# Altium PCB ChassisPowerDistribution_B_2.5_RW.PcbDoc
Units mil, origin at the board's own origin, x right, y up, seen from the top; angles counter-clockwise.
Board outline 5000 x 4750 mil, 2 copper layers (Top Layer, Bottom Layer); 160 components, 75 nets, 526 pads, 12 vias.
Unrouted connection lines stored in the file: 386.
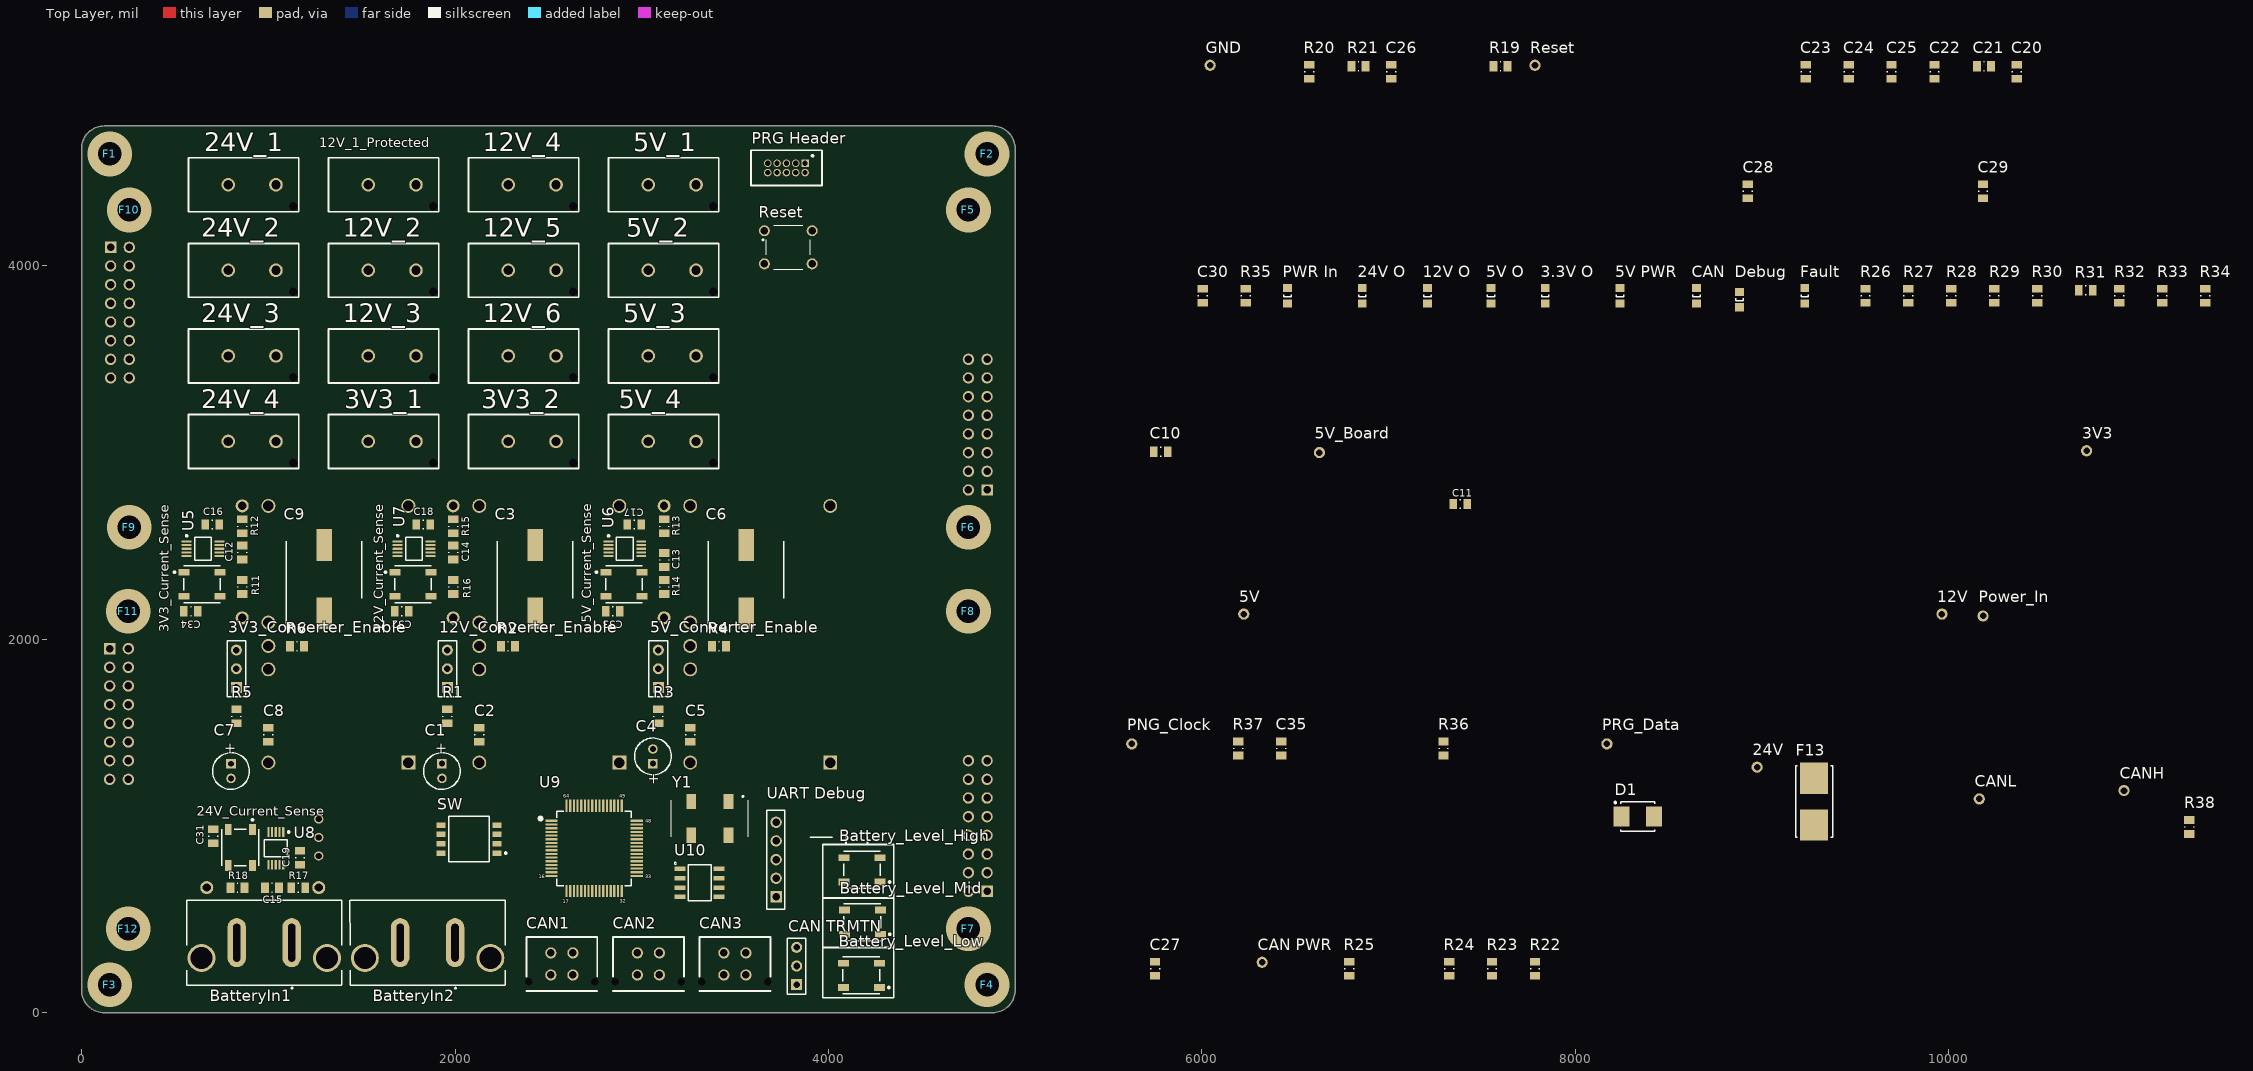
[diagram p0: Top Layer view]
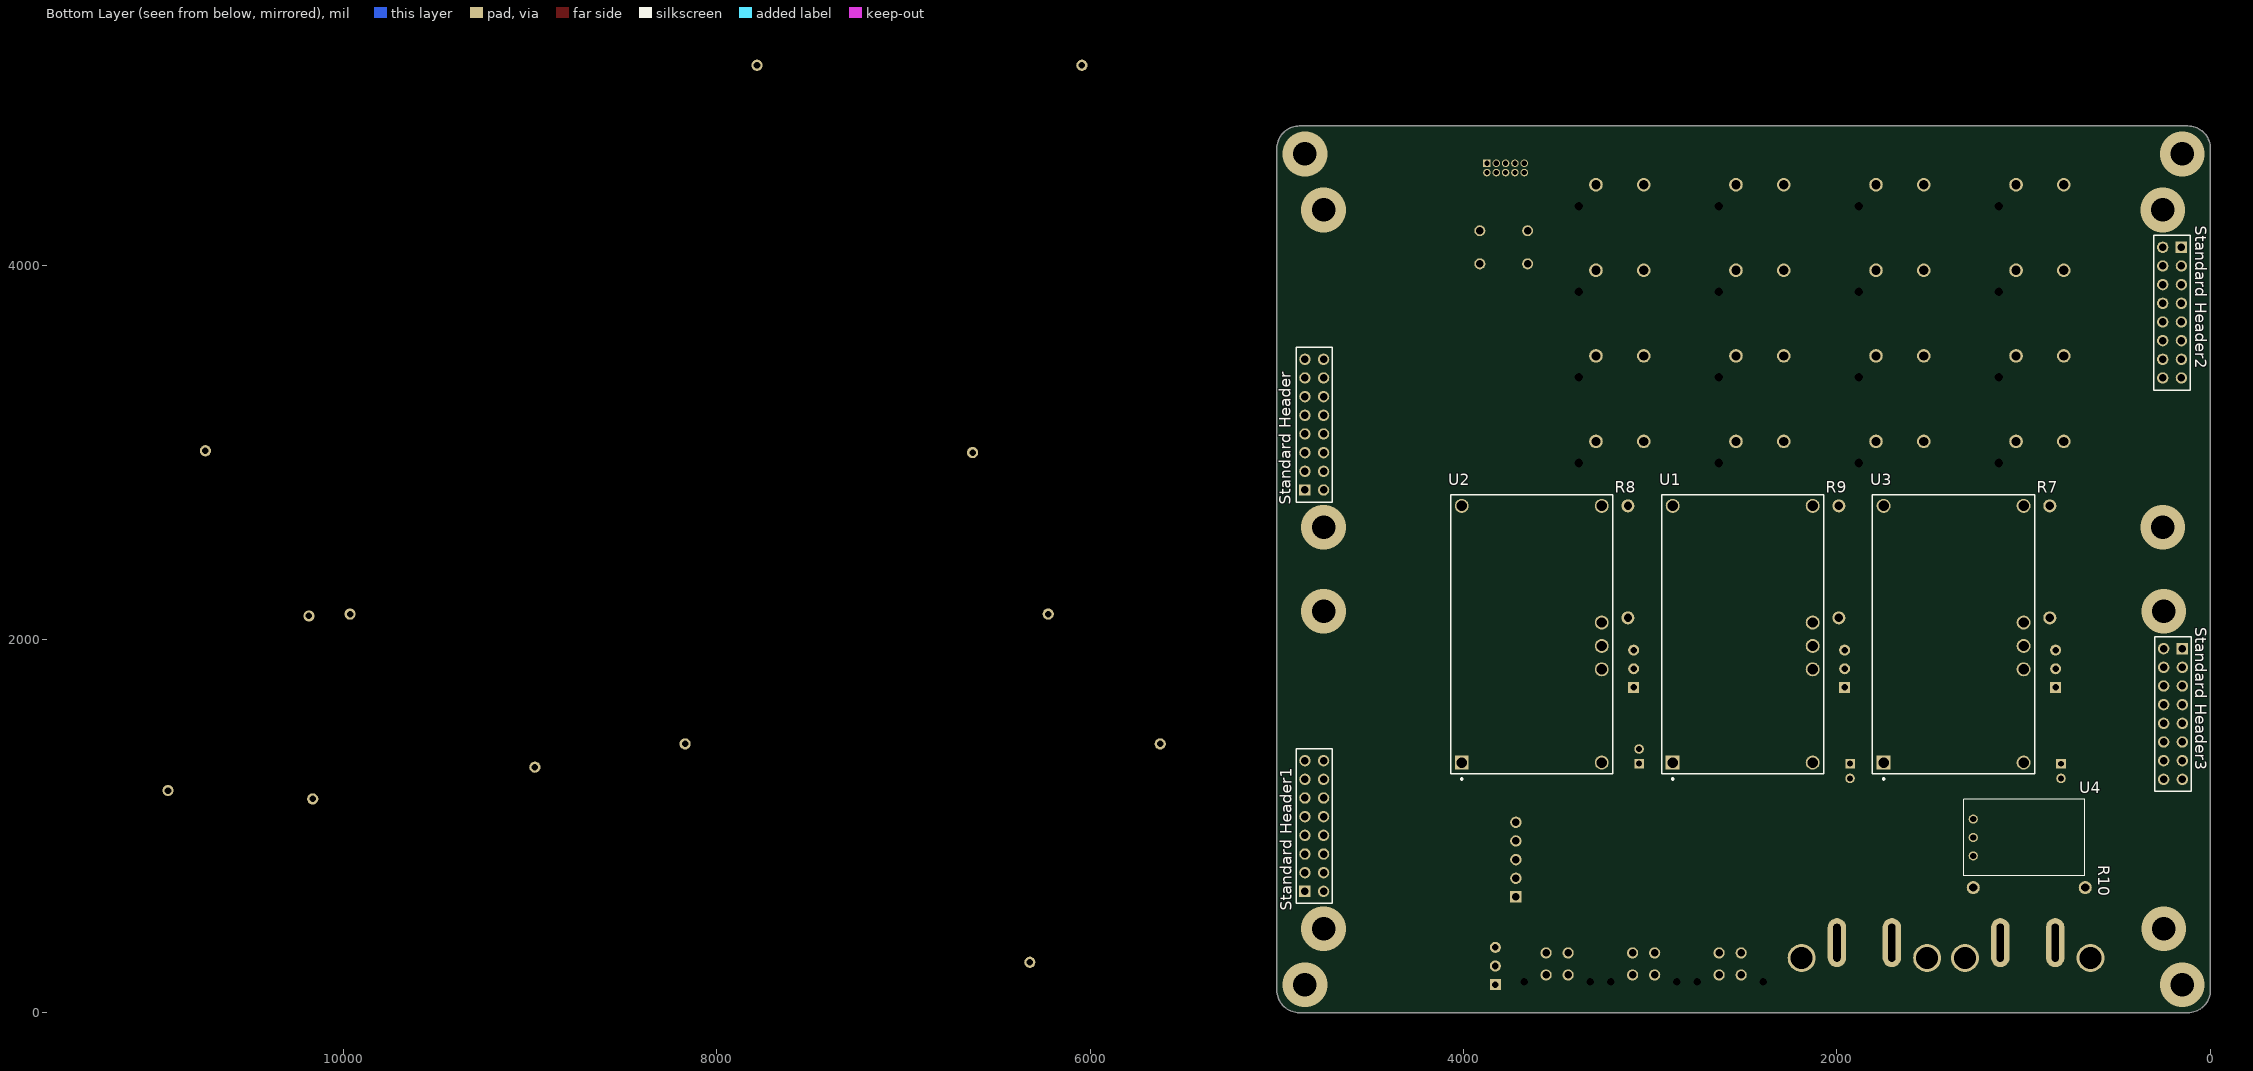
[diagram p1: Bottom Layer view, seen from below]

## Layer stack, top to bottom
Top Solder: solder mask 0.4, Solder Resist, Dk 3.5
Top Layer: signal copper 1.4
Dielectric 1: dielectric 12.6, FR-4, Dk 4.8
Bottom Layer: signal copper 1.4
Bottom Solder: solder mask 0.4, Solder Resist, Dk 3.5

## Board outline
120,0 4880,0 ccw(c4880,120) 5000,120 5000,4630 ccw(c4880,4630) 4880,4750 120,4750 ccw(c120,4630) 0,4630 0,120 ccw(c120,120)

## Design rules (kind name [scope] priority, off if disabled: settings)
BoardOutlineClearance [All] p1: gap=7.87 ignorepadtopadclearanceinfootprint=FALSE except(15.75: Arc-SplitBarrior Arc-SplitContinuation Track-SplitBarrior Track-SplitContinuation SMDPad-SplitBarrior SMDPad-SplitContinuation THPad-SplitBarrior THPad-SplitContinuation Via-SplitBarrior Via-SplitContinuation Fill-SplitBarrior Fill-SplitContinuation Poly-SplitBarrior Poly-SplitContinuation Region-SplitBarrior Region-SplitContinuation Text-SplitBarrior Text-SplitContinuation)
Clearance "Clearance Bottom Layer" [OnLayer('Bottom Layer')] p1: gap=8 ignorepadtopadclearanceinfootprint=TRUE except(10: Arc-Text Track-Text SMDPad-Text THPad-Text Via-Text Fill-Text Poly-Text Region-Text Text-Text)
Clearance "Clearance Top Layer" [OnLayer('Top Layer')] p2: gap=8 ignorepadtopadclearanceinfootprint=TRUE except(10: Arc-Text Track-Text SMDPad-Text THPad-Text Via-Text Fill-Text Poly-Text Region-Text Text-Text)
Clearance [All] p3: gap=7.87 ignorepadtopadclearanceinfootprint=FALSE except(3.5: Arc-Arc Arc-Track Arc-SMDPad Track-Track Track-SMDPad SMDPad-SMDPad; 5: Arc-Via Track-Via SMDPad-Via THPad-Via Via-Via; 10: Arc-Text Track-Text SMDPad-Text THPad-Text Via-Text Fill-Text Poly-Text Region-Text Text-Text)
HoleSize [All] p1: absolutevalues=TRUE maxlimit=248.03 minlimit=7.87 maxpercent=80.000 minpercent=20.000
MinimumAnnularRing [All] p1: minimumring=3
MinimumSolderMaskSliver [All] p1: minsoldermaskwidth=3.94
PolygonConnect PolygonConnect_1 [All] p1: thpad.connectstyle=Relief thpad.reliefconductorwidth=20 thpad.reliefentries=4 thpad.polygonreliefangle="90 Angle" thpad.airgapwidth=10 smdpad.connectstyle=Relief smdpad.reliefconductorwidth=20 smdpad.reliefentries=4 smdpad.polygonreliefangle="90 Angle" smdpad.airgapwidth=10 via.connectstyle=Direct via.reliefconductorwidth=20 via.reliefentries=4 via.polygonreliefangle="90 Angle" via.airgapwidth=10
RoutingCorners [All] p1: cornerstyle=Round minsetback=100 maxsetback=100
RoutingVias [All] p1: holewidth=19.68 width=39.37 viastyle="Through Hole" minholewidth=7.87 minwidth=17.72 maxholewidth=39.37 maxwidth=78.74
SilkToSilkClearance [All] p1: silktosilkclearance=3.94
SilkToSolderMaskClearance [IsPad] p1: minsilkscreentomaskgap=3.94 clearancetoexposedcopper=TRUE
SolderMaskExpansion [All] p1: expansion=4 istentingtop=FALSE
Width [All] p1: maxlimit=100 minlimit=3.5 preferedwidth=15
25 further rules are at their usual default settings.

## Classes and differential pairs
component class Microcontroller: C20 C21 C22 C23 C24 C25 C26 F1 F2 F3 F4 GND R19 R20 R21 Reset U9 Y1
component class LEDs: "3.3V O" 3V3_Current_Sense "5V O" "5V PWR" 5V_Current_Sense "12V O" 12V_Current_Sense "24V O" 24V_Current_Sense Battery_Level_High Battery_Level_Low Battery_Level_Mid C28 C29 C30 C31 C32 C33 C34 CAN Debug Fault "PWR In" R26 R27 R28 R29 R30 R31 R32 R33 R34 R35
component class "Current Sensors": C12 C13 C14 C15 C16 C17 C18 C19 R7 R8 R9 R10 R11 R12 R13 R14 R15 R16 R17 R18 U5 U6 U7 U8
component class Converters: 3V3 3V3_Converter_Enable 5V 5V_Board 5V_Converter_Enable 12V 12V_Converter_Enable 6006.102 C1 C2 C3 C4 C5 C6 C7 C8 C9 C10 C11 Power_In R1 R2 R3 R4 R5 R6 U1 U2 U3 U4
component class Connectors: 3V3_1 3V3_2 5V_1 5V_2 5V_3 5V_4 12V_1_Protected 12V_2 12V_3 12V_4 12V_5 12V_6 24V 24V_1 24V_2 24V_3 24V_4 BatteryIn1 BatteryIn2 C35 CAN1 CAN2 CAN3 "CAN TRMTN" CANH CANL D1 F5 F6 F7 F8 F9 F10 F11 F12 F13 PNG_Clock "PRG Header" PRG_Data R36 R37 R38 "Standard Header" "Standard Header1" "Standard Header2" "Standard Header3" "UART Debug"
component class CAN: C27 "CAN PWR" R22 R23 R24 R25 SW U10

## Components (designator, comment, footprint, x,y, rotation, side; value= is the part's Value field where it differs from the comment)
"3.3V O" "Yellow LED" 0805_A 7840,3840 r90 top
3V3 "Test Point" "Test Point Through-hole" 10765,2990 r90 top
3V3_1 "Molex 6.5MM  power connector" "power connector" 1302.8,3240.71 r270 top
3V3_2 "Molex 6.5MM  power connector" "power connector" 2052.8,3240.71 r270 top
3V3_Converter_Enable "Header 3" HDR1X3 828.89,1742.24 r90 top
3V3_Current_Sense "RBG_LED" RGB_LED_1 644.99,2295 r0 top
5V "Test Point" "Test Point Through-hole" 6205,2110 r0 top
"5V O" "Yellow LED" 0805_A 7550,3840 r90 top
"5V PWR" "Yellow LED" 0805_A 8240,3840 r90 top
5V_1 "Molex 6.5MM  power connector" "power connector" 2802.8,4615.71 r270 top
5V_2 "Molex 6.5MM  power connector" "power connector" 2802.8,4157.38 r270 top
5V_3 "Molex 6.5MM  power connector" "power connector" 2802.8,3699.04 r270 top
5V_4 "Molex 6.5MM  power connector" "power connector" 2802.8,3240.71 r270 top
5V_Board "Test Point" "Test Point Through-hole" 6655,2980 r90 top
5V_Converter_Enable "Header 3" HDR1X3 3088.9,1742.24 r90 top
5V_Current_Sense "RBG_LED" RGB_LED_1 2905,2295 r0 top
12V "Test Point" "Test Point Through-hole" 9990,2115 r90 top
"12V O" "Yellow LED" 0805_A 7210,3840 r90 top
12V_1_Protected "Molex 6.5MM  power connector" "power connector" 1302.8,4615.71 r270 top
12V_2 "Molex 6.5MM  power connector" "power connector" 1302.8,4157.38 r270 top
12V_3 "Molex 6.5MM  power connector" "power connector" 1302.8,3699.04 r270 top
12V_4 "Molex 6.5MM  power connector" "power connector" 2052.8,4615.71 r270 top
12V_5 "Molex 6.5MM  power connector" "power connector" 2052.8,4157.38 r270 top
12V_6 "Molex 6.5MM  power connector" "power connector" 2052.8,3699.04 r270 top
12V_Converter_Enable "Header 3" HDR1X3 1958.9,1742.24 r90 top
12V_Current_Sense "RBG_LED" RGB_LED_1 1775,2295 r0 top
24V "Test Point" "Test Point Through-hole" 9000,1295 r90 top
"24V O" "Yellow LED" 0805_A 6860,3840 r90 top
24V_1 "Molex 6.5MM  power connector" "power connector" 552.8,4615.71 r270 top
24V_2 "Molex 6.5MM  power connector" "power connector" 552.8,4157.38 r270 top
24V_3 "Molex 6.5MM  power connector" "power connector" 552.8,3699.04 r270 top
24V_4 "Molex 6.5MM  power connector" "power connector" 552.8,3240.71 r270 top
24V_Current_Sense "RBG_LED" RGB_LED_1 850,884.99 r270 top
Battery_Level_High "RBG_LED" RGB_LED_1 4180,765 r180 top
Battery_Level_Low "RBG_LED" RGB_LED_1 4176.46,200.04 r180 top
Battery_Level_Mid "RBG_LED" RGB_LED_1 4181.46,484.96 r180 top
BatteryIn1 "Super Saber" "Super Sabre" 571.45,175.29 r0 top
BatteryIn2 "Super Saber" "Super Sabre" 1446.45,175.29 r0 top
C1 "ECA1HM100" CAPPR55-200-1100X500X1200 1930,1294.41 r270 top
C2 "Capacitor 0805" "Cap 0805" 2130,1489.41 r270 top
C3 "Motor Capacitor SMD" CAP_SMD_CAN 2428.9,2322.24 r90 top value="330 uF"
C4 "ECA1HM100" CAPPR55-200-1100X500X1200 3060,1373.15 r90 top
C5 "Capacitor 0805" "Cap 0805" 3260,1489.41 r270 top
C6 "Motor Capacitor SMD" CAP_SMD_CAN 3558.9,2322.24 r90 top value="330 uF"
C7 "ECA1HM100" CAPPR55-200-1100X500X1200 799.99,1294.4 r270 top
C8 "Capacitor 0805" "Cap 0805" 999.99,1489.41 r270 top
C9 "Motor Capacitor SMD" CAP_SMD_CAN 1298.89,2322.24 r90 top value="330 uF"
C10 "Capacitor 0805" "Cap 0805" 5780,3005 r0 top
C11 "Capacitor 0805" "Cap 0805" 7385,2725 r0 top
C12 "0805 Capacitor" "Cap 0805" 859.99,2465 r270 top value=0.1µF
C13 "0805 Capacitor" "Cap 0805" 3120,2425 r270 top value=0.1µF
C14 "0805 Capacitor" "Cap 0805" 1990,2465 r270 top value=0.1µF
C15 "0805 Capacitor" "Cap 0805" 1020,669.99 r180 top value=0.1µF
C16 "Capacitor 0805" "Cap 0805" 699.99,2615 r180 top
C17 "Capacitor 0805" "Cap 0805" 2960,2615 r180 top
C18 "Capacitor 0805" "Cap 0805" 1830,2615 r0 top
C19 "Capacitor 0805" "Cap 0805" 1170,829.99 r270 top
C20 "Capacitor 0805" "Cap 0805" 10365,5040 r90 top
C21 "Capacitor 0805" "Cap 0805" 10190,5070 r0 top
C22 "Capacitor 0805" "Cap 0805" 9925,5040 r90 top
C23 "0805 Capacitor" "Cap 0805" 9235,5040 r90 top value=0.1µF
C24 "Capacitor 0805" "Cap 0805" 9465,5040 r90 top
C25 "Capacitor 0805" "Cap 0805" 9695,5040 r90 top
C26 "Capacitor 0805" "Cap 0805" 7015,5040 r90 top
C27 "Capacitor 0805" "Cap 0805" 5750,235 r90 top
C28 "0805 Capacitor" "Cap 0805" 8925,4400 r90 top value=0.1µF
C29 "0805 Capacitor" "Cap 0805" 10185,4400 r90 top value=0.1µF
C30 "0805 Capacitor" "Cap 0805" 6005,3840 r90 top value=0.1µF
C31 "0805 Capacitor" "Cap 0805" 705,944.99 r270 top value=0.1µF
C32 "0805 Capacitor" "Cap 0805" 1715,2150 r0 top value=0.1µF
C33 "0805 Capacitor" "Cap 0805" 2845,2150 r0 top value=0.1µF
C34 "0805 Capacitor" "Cap 0805" 584.99,2150 r0 top value=0.1µF
C35 "Capacitor 0805" "Cap 0805" 6425,1415 r90 top
CAN "Blue LED" 0805_A 8650,3840 r90 top
CAN1 "Molex Micro" "microfit 4 pin" 2572.17,261.06 r0 top
CAN2 "Molex Micro" "microfit 4 pin" 3035.61,261.06 r0 top
CAN3 "Molex Micro" "microfit 4 pin" 3499.06,261.06 r0 top
"CAN PWR" "Test Point" "Test Point Through-hole" 6348.7,250 r90 top
"CAN TRMTN" "Header 3" HDR1X3 3830,150 r90 top
CANH "Test Point" "Test Point Through-hole" 10965,1170 r90 top
CANL "Test Point" "Test Point Through-hole" 10190,1125 r90 top
D1 "1SMB5928BT3G" ONSC-SMB-2-403A-03_H_V 8335,1050 r0 top
Debug "Green LED" 0805_A 8880,3820 r90 top
F1 "Screw Hole" "Screw Hole" 150,4600 r0 top locked
F2 "Screw Hole" "Screw Hole" 4850,4600 r0 top
F3 "Screw Hole" "Screw Hole" 150,150 r0 top locked
F4 "Screw Hole" "Screw Hole" 4850,150 r0 top
F5 "Screw Hole" "Screw Hole" 4750,4300 r0 top
F6 "Screw Hole" "Screw Hole" 4750,2600 r0 top
F7 "Screw Hole" "Screw Hole" 4750,450 r0 top
F8 "Screw Hole" "Screw Hole" 4750,2150 r0 top
F9 "Screw Hole" "Screw Hole" 255,2600 r0 top locked
F10 "Screw Hole" "Screw Hole" 255,4300 r0 top locked
F11 "Screw Hole" "Screw Hole" 250,2150 r0 top locked
F12 "Screw Hole" "Screw Hole" 250,450 r0 top locked
F13 "015402.5DRT" FP-0154-MFG 9280,1130 r90 top
Fault "Red LED" 0805_A 9230,3840 r90 top
GND "Test Point" "Test Point Through-hole" 6070,5055 r90 top
PNG_Clock "Test Point" "Test Point Through-hole" 5650,1420 r90 top
Power_In "Test Point" "Test Point Through-hole" 10210,2105 r90 top
"PRG Header" "Programming Header" programming3D 3970.28,4641.77 r180 top
PRG_Data "Test Point" "Test Point Through-hole" 8195,1420 r90 top
"PWR In" "Yellow LED" 0805_A 6460,3840 r90 top
R1 "Resistor 0805" RESC0805(2012)_N 1958.9,1587.24 r90 top value="4.7 kOhm"
R2 "Resistor 0805" RESC0805(2012)_N 2283.9,1962.24 r0 top value="732 Ohm"
R3 "Resistor 0805" RESC0805(2012)_N 3088.9,1587.24 r90 top value="4.7 kOhm"
R4 "Resistor 0805" RESC0805(2012)_N 3413.9,1962.24 r0 top value="21 kOhm"
R5 "Resistor 0805" RESC0805(2012)_N 828.89,1587.24 r90 top value="4.7 kOhm"
R6 "Resistor 0805" RESC0805(2012)_N 1153.89,1962.24 r0 top value="78.7 kOhm"
R7 "Current Sensing resistor" "Shunt Resistor" 859.99,2115 r90 bottom value="2.5 mOhm"
R8 "Current Sensing resistor" "Shunt Resistor" 3120,2715 r270 bottom value="2.5 mOhm"
R9 "Current Sensing resistor" "Shunt Resistor" 1990,2715 r270 bottom value="2.5 mOhm"
R10 "Current Sensing resistor" "Shunt Resistor" 1270,669.99 r180 bottom value="2.5 mOhm"
R11 "Resistor 0805" RESC0805(2012)_N 859.99,2280 r270 top value="10 Ohm"
R12 "Resistor 0805" RESC0805(2012)_N 859.99,2605 r90 top value="10 Ohm"
R13 "Resistor 0805" RESC0805(2012)_N 3120,2605 r90 top value="10 Ohm"
R14 "Resistor 0805" RESC0805(2012)_N 3120,2280 r270 top value="10 Ohm"
R15 "Resistor 0805" RESC0805(2012)_N 1990,2605 r90 top value="10 Ohm"
R16 "Resistor 0805" RESC0805(2012)_N 1990,2280 r270 top value="10 Ohm"
R17 "Resistor 0805" RESC0805(2012)_N 1160,669.99 r0 top value="10 Ohm"
R18 "Resistor 0805" RESC0805(2012)_N 835,669.99 r180 top value="10 Ohm"
R19 "Resistor 0805" RESC0805(2012)_N 7600,5070 r0 top value="100 Ohm"
R20 "Resistor 0805" RESC0805(2012)_N 6575,5040 r90 top value="4.7 kOhm"
R21 "Resistor 0805" RESC0805(2012)_N 6840,5070 r0 top value="4.7 kOhm"
R22 "Resistor 0805" RESC0805(2012)_N 7785,235 r90 top value=120R
R23 "Resistor 0805" RESC0805(2012)_N 7555,235 r90 top value=120R
R24 "Resistor 0805" RESC0805(2012)_N 7325,235 r90 top value=120R
R25 "Resistor 0805" RESC0805(2012)_N 6790,235 r90 top value=120R
R26 "Resistor 0805" RESC0805(2012)_N 9555,3840 r90 top value="1.6 kOhm"
R27 "Resistor 0805" RESC0805(2012)_N 9785,3840 r90 top value="1.6 kOhm"
R28 "Resistor 0805" RESC0805(2012)_N 10015,3840 r90 top value="820 Ohm"
R29 "Resistor 0805" RESC0805(2012)_N 10245,3840 r90 top value="330 Ohm"
R30 "Resistor 0805" RESC0805(2012)_N 10475,3840 r90 top value="120 Ohm"
R31 "Resistor 0805" RESC0805(2012)_N 10735,3870 r0 top value="330 Ohm"
R32 "Resistor 0805" RESC0805(2012)_N 10915,3840 r90 top value="200 Ohm"
R33 "Resistor 0805" RESC0805(2012)_N 11145,3840 r90 top value="330 Ohm"
R34 "Resistor 0805" RESC0805(2012)_N 11375,3840 r90 top value="330 Ohm"
R35 "Resistor 0805" RESC0805(2012)_N 6235,3840 r90 top value="470 Ohm"
R36 "Resistor 0805" RESC0805(2012)_N 7295,1415 r90 top value="47 kOhm"
R37 "Resistor 0805" RESC0805(2012)_N 6195,1415 r90 top value="47 kOhm"
R38 "Resistor 0805" RESC0805(2012)_N 11290,995 r90 top value=120R
Reset "1825910-7" "Switch 6mm 24V (NO)" 3785,4100 r0 top
Reset "Test Point" "Test Point Through-hole" 7810,5055 r90 top
"Standard Header" "Stacking Header" SMTC-SSQ-108-02-X-D 4850,2800 r90 bottom
"Standard Header1" "Stacking Header" SMTC-SSQ-108-02-X-D 4850,650 r90 bottom
"Standard Header2" "Stacking Header" SMTC-SSQ-108-02-X-D 155,4100 r270 bottom locked
"Standard Header3" "Stacking Header" SMTC-SSQ-108-02-X-D 150,1950 r270 bottom locked
SW "TDA04H0SB1" CKCP-TDA04H0SB1R_V 2075,930 r180 top
U1 "PTN78020WAH" EUK0007A 2504.8,2027.01 r90 bottom
U2 "PTN78020WAH" EUK0007A 3634.8,2027.01 r90 bottom
U3 "PTN78020WAH" EUK0007A 1374.79,2027.01 r90 bottom
U4 "OKI-78SR-5_1.5-W36H-C" OKI-78SR-HORIZONTAL 996.38,938.43 r270 bottom
U5 "INA226AIDGST" DGS0010A_N 649.99,2485 r0 top
U6 "INA226AIDGST" DGS0010A_N 2910,2485 r0 top
U7 "INA226AIDGST" DGS0010A_N 1780,2485 r0 top
U8 "INA226AIDGST" DGS0010A_N 1040,879.99 r270 top
U9 "CY8C4248AZI-L485" TQFP50P1200X1200X160-64N 2745,880 r0 top
U10 "MCP2562-E/SN" SOIC127P600X175-8N 3310,695 r0 top
"UART Debug" "UART Debuging Header" "UART Debugging Header" 3770,550 r90 top
Y1 "40k Hz" SG-636_3D 3365,1040.55 r180 top

## Footprints (in the part's own frame and the unit in brackets; to place one, negate y for a bottom-side part, rotate by r counter-clockwise, add the part's x,y. Pads: shape width x height; smd on the part's side, far side on the other; paste and mask are expansions set on the pad)
0805_A [mm] "Chip LED, 2-Leads, Body 2.0x1.3mm, IPC Medium Density"
  rect 1.1x1.2 smd: 1(-1.05,0) 2(1.05,0)
  silkscreen extent -0.15,-0.5 0.15,0.5, body extent -1,-0.62 1,0.63, height 0.68
"Cap 0805" [mm]
  rect 1.05x1.4 smd: 1(-0.95,0) 2(0.95,0)
  silkscreen extent -0.05,-0.6 0.05,0.6, body extent -1.1,-0.67 1.1,0.68, height 0.7
CAP_SMD_CAN [mm]
  rect 4.3x2.1 smd: 1(-4.65,0) 2(4.65,0)
  silkscreen extent -6.8,-5.15 5.15,5.15, body extent -6.79,-5.21 5.21,5.29, height 10.5
CAPPR55-200-1100X500X1200 [mm] "THD, 2-Leads, Dia 5mm, Body Length 11mm"
  rect 1.3x1.3 hole 0.8: 1(-1,0)
  round 1.3 hole 0.8: 2(1,0)
  silkscreen extent -2.5,-2.5 2.5,2.5, body extent -2.5,-2.5 2.5,2.5, height 12
CKCP-TDA04H0SB1R_V [mm] "SMD, 8-Leads, Body 6.21x6.2mm, Pitch 1.27mm"
  rect 1.27x0.76 smd: 1(-3.81,1.905) 2(-3.81,0.635) 3(-3.81,-0.635) 4(-3.81,-1.905) 5(3.81,-1.905) 6(3.81,-0.635) 7(3.81,0.635) 8(3.81,1.905)
  silkscreen extent -5.12,-3.11 2.78,3.11, body extent -4.06,-3.1 4.06,3.11, height 2.3
DGS0010A_N [mm] "SOP, 10-Leads, Body 3.1x3.1mm, Pitch 0.5mm, IPC Medium Density"
  rrect33% 1.35x0.3 smd: 1(-2.225,1) 2(-2.225,0.5) 3(-2.225,0) 4(-2.225,-0.5) 5(-2.225,-1) 6(2.225,-1) 7(2.225,-0.5) 8(2.225,0) 9(2.225,0.5) 10(2.225,1)
  silkscreen extent -2.35,-1.55 1.15,1.87, body extent -2.45,-1.5 2.45,1.5, height 0.94
EUK0007A [mm] "Module, 7-Leads, Body 37.97x22.1mm"
  rect 1.9x1.9 hole 1.4: 1(-17.465,9.53)
  round 1.9 hole 1.4: 2(-17.465,-9.52) 3(-4.765,-9.52) 4(-1.585,-9.52) 5(1.595,-9.52) 6(17.475,-9.52) 7(17.475,9.53)
  silkscreen extent -19.81,-11.05 18.98,11.05, body extent -18.98,-11.05 18.98,11.05, height 9
FP-0154-MFG [mil]
  rect 167x150 smd paste+0 mask+0: 1(-125.5,0) 2(125.5,0)
  silkscreen extent -192,-99 192,99, body extent -213,-103 213,103, height 10
HDR1X3 [mm] "Connector; Header; 3 Position"
  rect 1.5x1.5 hole 0.9: 1(0,0)
  round 1.5 hole 0.9: 2(2.54,0) 3(5.08,0)
  silkscreen extent -1.27,-1.27 6.35,1.27
"microfit 4 pin" [mil] "Molex micro-fit 3.0 4 pos"
  round 60 hole 40: 1(-59.06,59.06) 2(-59.06,-59.06) 3(59.06,59.06) 4(59.06,-59.06)
  round 0 hole 40 unplated: 7(177.17,-96.06) ""(-177.17,-96.06)
  silkscreen extent -190,-145 190,145, body extent -200,-187 200,159, height 391
OKI-78SR-HORIZONTAL [mm]
  round 1.252 hole 0.835: 1(2.5,-6.95) 2(0,-6.95) 3(-2.5,-6.95)
  silkscreen extent -5.2,-8.25 5.2,8.25, body extent -5.21,-8.76 5.21,10.29, height 9.26
ONSC-SMB-2-403A-03_H_V [mil] "Molded, 2-Leads, Body 4.6x3.95mm"
  rect 85x107.99 smd: 1(-87.01,0) 2(87.01,0)
  silkscreen extent -125,-79 91,81, body extent -91,-78 91,78, height 95
"power connector" [mm]
  round 1.85 hole 1.25: 1(4.59,5.898) 2(4.59,12.398)
  round 0 hole 1.2 unplated: 9(7.51,14.748)
  silkscreen extent 0.92,0.5 8.26,15.5, body extent 0.91,0.5 8.25,15.5, height 16.01
programming3D [mil]
  rect 40x40 hole 28 mask+3: 1(95.28,91.77)
  round 40 hole 28 mask+3: 2(95.28,141.77) 3(145.28,91.77) 4(145.28,141.77) 5(195.28,91.77) 6(195.28,141.77) 7(245.28,91.77) 8(245.28,141.77) 9(295.28,91.77) 10(295.28,141.77)
  silkscreen extent 5,22 385,211, body extent 70,19 320,219, height 226
RESC0805(2012)_N [mm] "Chip Resistor, Body 2.0x1.3mm, IPC Medium Density"
  rect 1.05x1.4 smd: 1(-0.95,0) 2(0.95,0)
  silkscreen extent -0.05,-0.6 0.05,0.6, body extent -1.1,-0.67 1.1,0.68, height 0.7
RGB_LED_1 [mm]
  rect 1.5x0.9 smd: 1(-2.45,1.65) 2(-2.45,-1.65) 3(2.45,-1.65) 4(2.45,1.65)
  silkscreen extent -3.87,-2.5 2.5,2.5, body extent -2.7,-2.5 2.7,2.5, height 1.69
"Screw Hole" [mil]
SG-636_3D [mm]
  rect 1.3x2.1 smd: 1(-2.54,-2.3) 2(2.54,-2.3) 3(2.54,2.3) 4(-2.54,2.3)
  silkscreen extent -5.25,-3.1 5.25,2.5, body extent -5.25,-3.22 5.25,3.22, height 2.8
"Shunt Resistor" [mil]
  round 70 hole 44: 1(0,0) 2(600,0)
SMTC-SSQ-108-02-X-D [mm] "SQ Post Socket, 2x8 Pins, Vertical, 2.54mm Pitch, Female"
  rect 1.55x1.55 hole 1.02: 1(0,0)
  round 1.55 hole 1.02: 2(0,-2.54) 3(2.54,0) 4(2.54,-2.54) 5(5.08,0) 6(5.08,-2.54) 7(7.62,0) 8(7.62,-2.54) 9(10.16,0) 10(10.16,-2.54) 11(12.7,0) 12(12.7,-2.54) 13(15.24,0) 14(15.24,-2.54) 15(17.78,0) 16(17.78,-2.54)
  silkscreen extent -1.65,-3.74 19.43,1.2, body extent -1.52,-3.75 19.3,1.21, height 8.51
SOIC127P600X175-8N [mm]
  rect 1.5x0.6 smd: 1(-2.65,1.905) 2(-2.65,0.635) 3(-2.65,-0.635) 4(-2.65,-1.905) 5(2.65,-1.905) 6(2.65,-0.635) 7(2.65,0.635) 8(2.65,1.905)
  silkscreen extent -3.44,-2.45 1.58,2.81, body extent -3.12,-2.45 3.13,2.45, height 1.76
"Super Sabre" [mil]
  oval 99x263 hole 203 slot 39 at 0 deg: 1(553.55,199.71) 2(259.55,199.71)
  round 150 hole 118: ""(70.55,117.71) ""(742.55,117.71)
  silkscreen extent -9,-48 822,427, body extent -12,-105 818,422, height 586
"Switch 6mm 24V (NO)" [mm]
  round 1.498 hole 0.99: 1a(-3.25,2.25) 1b(3.25,2.25) 2a(-3.25,-2.25) 2b(3.25,-2.25)
  silkscreen extent -3.53,-3 3,3, body extent -3.9,-2.99 3.9,3, height 5.01
"Test Point Through-hole" [mil]
  round 60 hole 35: 1(20,25)
TQFP50P1200X1200X160-64N [mm]
  rect 1.65x0.3 smd mask+0: 1(-5.801,3.75) 2(-5.801,3.25) 3(-5.801,2.75) 4(-5.801,2.25) 5(-5.801,1.75) 6(-5.801,1.25) 7(-5.801,0.75) 8(-5.801,0.25) 9(-5.801,-0.25) 10(-5.801,-0.75) 11(-5.801,-1.25) 12(-5.801,-1.75) 13(-5.801,-2.25) 14(-5.801,-2.75) 15(-5.801,-3.25) 16(-5.801,-3.75) 33(5.801,-3.75) 34(5.801,-3.25) 35(5.801,-2.75) 36(5.801,-2.25) 37(5.801,-1.75) 38(5.801,-1.25) 39(5.801,-0.75) 40(5.801,-0.25) 41(5.801,0.25) 42(5.801,0.75) 43(5.801,1.25) 44(5.801,1.75) 45(5.801,2.25) 46(5.801,2.75) 47(5.801,3.25) 48(5.801,3.75)
  rect 0.3x1.65 smd mask+0: 17(-3.75,-5.801) 18(-3.25,-5.801) 19(-2.75,-5.801) 20(-2.25,-5.801) 21(-1.75,-5.801) 22(-1.25,-5.801) 23(-0.75,-5.801) 24(-0.25,-5.801) 25(0.25,-5.801) 26(0.75,-5.801) 27(1.25,-5.801) 28(1.75,-5.801) 29(2.25,-5.801) 30(2.75,-5.801) 31(3.25,-5.801) 32(3.75,-5.801) 49(3.75,5.801) 50(3.25,5.801) 51(2.75,5.801) 52(2.25,5.801) 53(1.75,5.801) 54(1.25,5.801) 55(0.75,5.801) 56(0.25,5.801) 57(-0.25,5.801) 58(-0.75,5.801) 59(-1.25,5.801) 60(-1.75,5.801) 61(-2.25,5.801) 62(-2.75,5.801) 63(-3.25,5.801) 64(-3.75,5.801)
  silkscreen extent -7.49,-5.05 5.05,5.05, body extent -5.12,-5.12 5.12,5.12, height 1.6
"UART Debugging Header" [mm]
  rect 1.55x1.55 hole 1.02: 1(1.778,1.27)
  round 1.55 hole 1.02: 2(4.318,1.27) 3(6.858,1.27) 4(9.398,1.27) 5(11.938,1.27)
  silkscreen extent 0.13,0.07 13.59,2.54

## Part data
"3.3V O" "5V O" "5V PWR" "12V O" "24V O" "PWR In": library part LED, "Standard 0805 LED", Color=Yellow, PackageReference=0805_A
3V3_Converter_Enable 5V_Converter_Enable 12V_Converter_Enable "CAN TRMTN": "Header, 3-Pin", LatestRevisionDate=17-Jul-2002, LatestRevisionNote="Re-released for DXP Platform.", Publisher="Altium Limited"
3V3_Current_Sense 5V_Current_Sense 12V_Current_Sense 24V_Current_Sense Battery_Level_High Battery_Level_Low Battery_Level_Mid: library part CMP-003-0014-1, "LED ADAI-WS2812B-4", Component Type=Standard, ComponentLink1Description=Digi-Key_Purchase_URL, ComponentLink1URL=https://www.digikey.com/en/products/detail/broadcom-limited/ASMB-MTB1-0A3A2/5695366, ComponentLink2Description=Datasheet_Link, ComponentLink2URL=https://docs.broadcom.com/docs/AV02-4194EN, Design Item ID=RBG_LED, Digi-Key_Part_Number=516-3280-1-ND, Pin Count=4, Source=LED_RGB.SchLib
24V: library part CMP-012-0000-1, Component Type=Standard, Design Item ID="Test Point", Pin Count=1, Source="Test Points.SchLib"
C1 C4 C7: library part CMP-2100-03622-1, "Aluminum Electrolytic Capacitor, 10 uF, +/- 20%, 50 V, -40 to 85 degC, 2-Pin THD, RoHS, Bulk", Capacitance=10uF, Case/Package=Radial, Dielectric Material=Aluminium, Leakage Current=3uA, Manufacturer=Panasonic, Max Operating Temperature=85degC, Min Operating Temperature=-40degC, Package Description="2-Pin Radial Lead, Dia 5 mm, Height 12 mm", Package Quantity=200, Package Reference=CAPPR55-200-1100X500X1200, Ripple Current=65mA, Tolerance=20%, Voltage=50V, Datasheet URL=https://industrial.panasonic.com/cdbs/www-data/pdf/RDF0000/ABA0000C1218.pdf, Datasheet Version="Rev. 05, 10/2016", Diameter=5mm, Dissipation Factor=0.12%, Height=11mm, Height - Seated (Max)=0.472inch, Lead Diameter=0.5mm, Lead Free=LeadFree, Lead Pitch=2mm, Lead/Base Style=Straight, Length=11mm, Life (Hours)=2000Hour, Manufacturer URL=http://www.panasonic.com/, Mount=ThroughHole, Number of Pins=2, Packaging=Bulk, Radiation Hardening=No, REACH SVHC=NoSVHC, Ripple Current (AC)=65mA, RoHSCompliant=true, Termination=Radial, Voltage Rating=50V, Voltage Rating (DC)=50V
C2 C5 C8: "Standard Capacitor", Capacitance="2.2 µF", Case Size/Dimension=0805, Mounting Technology=SurfaceMount, Package Reference=0805
C3 C6 C9: "Capacitor Polarised", ComponentLink1Description=Digi-Key_Purchase_URL, ComponentLink1URL=https://www.digikey.com/en/products/detail/panasonic-electronic-components/EEE-FK1V331AP/1142089, ComponentLink2Description=Datasheet_Link, ComponentLink2URL=http://industrial.panasonic.com/www-cgi/jvcr13pz.cgi?E+PZ+3+ABA0088+EEEFK1V331AP+7+WW, Digi-Key_Part_Number=PCE4429CT-ND
C10: "Standard Capacitor", Capacitance="22 µF", Case Size/Dimension=0805, Mounting Technology=SurfaceMount, Package Reference=0805
C11 C21 C25: "Standard Capacitor", Capacitance="10 µF", Case Size/Dimension=0805, Mounting Technology=SurfaceMount, Package Reference=0805
C12 C13 C14 C15 C23 C28 C29 C30 C31 C32 C33 C34: library part CMP-002-0000-1, "Standard Capacitor", Case Size/Dimension=0805, Package Description="2-Pin Surface Mount Device, Body 2.01 x 1.25 mm", Tolerance (%)=±10%, Component Type=Standard, ComponentLink1Description=Digi-Key_Purchase_URL, ComponentLink1URL=https://www.digikey.com/product-detail/en/kemet/C0805C104Z5VACTU/399-1177-1-ND/411452, ComponentLink2Description="Datasheet Link", ComponentLink2URL=https://content.kemet.com/datasheets/KEM_C1005_Y5V_SMD.pdf, Design Item ID="0805 Capacitor", Digi-Key_Part_Number=399-1177-1-ND, Digikey URL=https://www.digikey.com/product-detail/en/kemet/C0805C104Z5VACTU/399-1177-1-ND/411452, Mounting Technology=SurfaceMount, Package Reference=0805, Pin Count=2, Source="Standard Cap.SchLib"
C16 C17 C18 C19 C20 C22 C26 C27 C35: "Standard Capacitor", Capacitance=0.1µF, Case Size/Dimension=0805, Dielectric=X5R, Manufacturer=AVX, Package Description="2-Pin Surface Mount Device, Body 2.01 x 1.25 mm", Rated Voltage=10V, Tolerance (%)=±10%, Datasheet URL=http://datasheets.avx.com/cx5r.pdf, Datasheet Version=05/2016, Manufacturer URL=http://www.avx.com/, Mounting Technology=SurfaceMount, Package Reference=0805
C24: "Standard Capacitor", Capacitance="1 µF", Case Size/Dimension=0805, Mounting Technology=SurfaceMount, Package Reference=0805
CAN: library part LED, "Standard 0805 LED", Color=Blue, PackageReference=0805_A
CAN1 CAN2 CAN3: library part "Molex micro-fit 4-pin (Single row schematic)", "Molex micro-fit 3.0 dual row header. P/N 0430450427"
D1: library part CMP-1060-00153-1, "3 W Zener Voltage Regulator, 2-Pin SMB, Pb-Free, Tape and Reel", Manufacturer="On Semiconductor", ComponentLink1Description="Manufacturer URL", ComponentLink1URL=http://www.onsemi.com/, ComponentLink2Description=Datasheet, ComponentLink2URL=http://www.onsemi.com/pub_link/Collateral/1SMB5913BT3-D.PDF, ComponentLink3Description="Package Specification", ComponentLink3URL=http://www.onsemi.com/pub_link/Collateral/1SMB5913BT3-D.PDF, DatasheetVersion="Rev. 8", Mounting Technology="Surface Mount", PackageDescription="2-Pin Small Molded Package, J-Bend Lead, Body 4.33 x 3.625 mm", PackageReference=SMB-2-403A-03_H, PackageVersion="Rev. H, 05/2011", Packing="Tape and Reel", PartNumber=1SMB5928BT3G, RoHS=Pb-Free, VZ Typ (V)=13
Debug: library part LED, "Standard 0805 LED", Color=Green, PackageReference=0805_A
F1 F2 F3 F4 F5 F6 F7 F8 F9 F10 F11 F12: "Add 4 of these to your design for screw hole mounting"
F13: library part CMP-2000-05609-2, "FUSE BRD MNT 2.5A 125VAC/VDC SMD", Fuse Current=2.5A, Manufacturer=Littelfuse, Max Fuse Ac Voltage=125V, Package=0154, Temperature="-55°C to +125°C", Temperature Range High=+125°C, Temperature Range Low=-55°C, Automotive=No, Category=Fuse, ComponentLink2Description=Datasheet, ComponentLink2URL=https://www.littelfuse.com/~/media/electronics/datasheets/fuses/littelfuse_fuse_154_154t_154l_154tl_datasheet.pdf.pdf, Device Class L1="Circuit Protection", Device Class L2=Fuses, Device Class L3=unset, Digikey Description="FUSE BRD MNT 2.5A 125VAC/VDC SMD", Fuse Blow Speed=Slow, Height=3.81mm, Lead Free=Yes, Manufacturer Part Number=015402.5DRT, Max Fuse Dc Voltage=125V, Mouser Description="Fuse Chip Slow Blow Acting 2.5A SMD Solder Pad 9.73 X 5.03 X 3.81mm T/R CSA/PSE/UL", Octopart=https://octopart.com/015402.5drt-littelfuse-565920, RoHS=TRUE
Fault: library part LED, "Standard 0805 LED", Color="Super Red", Manufacturer="Wuerth Elektronik", PartNumber=150080SS75000, ComponentLink1Description="Manufacturer URL", ComponentLink1URL=http://www.we-online.com, ComponentLink2Description=Datasheet, ComponentLink2URL=http://katalog.we-online.com/led/datasheet/150080SS75000.pdf, PackageReference=0805_A
R1 R3 R5 R19 R37: library part CMP-006-0001-1, "Generic 0805 Resistor", Case-EIA=0805, Case-Metric=2012, Power="0.125 W", Tolerance="5 %", Component Type=Standard, ComponentLink1Description=Digi-Key_Purchase_Link, ComponentLink1URL=https://www.digikey.com/product-detail/en/rohm-semiconductor/ESR10EZPJ121/RHM120KCT-ND/1762959, ComponentLink2Description="Datasheet Link", ComponentLink2URL=https://d1d2qsbl8m0m72.cloudfront.net/en/products/databook/datasheet/passive/resistor/chip_resistor/esr-e.pdf, Design Item ID="Resistor 0805", Digi-Key_Part_Number=RHM120KCT-ND, Pin Count=2, Source="CAN Termination Resistor 0805.SchLib", Technology=SMT
R2 R4 R6 R20 R21 R26 R27 R29 R31 R32 R33 R34: "Generic 0805 Resistor", Case-EIA=0805, Technology=SMT
R7 R8 R9 R10: library part CMP-017-0001-1, ComponentLink1Description=Digi-Key_Purchase_URL, ComponentLink1URL=https://www.digikey.com/en/products/detail/vishay-dale/SR32L500FE66/7560303?s=N4IgTCBcDaIM4CcDMYA2BWADJkBdAvkA, ComponentLink2Description=Datasheet_Link, ComponentLink2URL=https://www.vishay.com/docs/31067/sr.pdf, Design Item ID="Current Sensing resistor", Digi-Key_Part_Number=541-3933-ND, Source="CAN Termination Resistor 0805.SchLib"
R11 R12 R13 R14 R15 R16 R17 R18: library part CMP-006-0001-1, "Generic 0805 Resistor", Case-EIA=0805, Tolerance="5 %", Component Type=Standard, ComponentLink1Description=Digi-Key_Purchase_Link, ComponentLink1URL=https://www.digikey.com/product-detail/en/rohm-semiconductor/ESR10EZPJ121/RHM120KCT-ND/1762959, ComponentLink2Description="Datasheet Link", ComponentLink2URL=https://d1d2qsbl8m0m72.cloudfront.net/en/products/databook/datasheet/passive/resistor/chip_resistor/esr-e.pdf, Design Item ID="Resistor 0805", Pin Count=2, Technology=SMT
R22 R23 R24 R25 R28 R30 R36 R38: "Generic 0805 Resistor", Case-EIA=0805, Case-Metric=2012, Power="0.125 W", Tolerance="5 %", Technology=SMT
R35: library part CMP-006-0001-1, "Generic 0805 Resistor", Case-EIA=0805, Design Item ID="Resistor 0805", Pin Count=2, Technology=SMT
Reset: library part "Switch 6mm 24V (NO)", "FSM4JAH=6MM TACT SWITCH, HIGH TEMP", ComponentLink1Description=Digi-Key_Purchase_URL, ComponentLink1URL=https://www.digikey.com/en/products/detail/c-k/TDA04H0SB1/1083755, ComponentLink2Description="Datasheet Link", ComponentLink2URL=https://www.ckswitches.com/media/1328/tda.pdf, Digi-Key_Part_Number=CKN9065-ND, MF="TE Connectivity"
"Standard Header" "Standard Header1" "Standard Header2" "Standard Header3": "SQ Post Socket, Through-hole, Vertical, -55 to 125 degC, 2.54 mm Pitch, 16-Pin, Female, RoHS", Manufacturer=Samtec, PartNumber=SSQ-108-02-G-D, Temperature Range="-55 to 125 degC", ComponentLink1Description="Manufacturer URL", ComponentLink1URL=http://www.samtec.com, ComponentLink2Description=Datasheet, ComponentLink2URL=http://www.samtec.com/documents/webfiles/pdf/SSQ_TH.PDF, ComponentLink3Description="Package Specification", ComponentLink3URL=http://www.samtec.com/documents/webfiles/cpdf/SSQ-1XX-XX-XXX-X-XX-XXX-XX-X-MKT.pdf, DatasheetVersion=F-214, Mounting Technology=Through-hole, Orientation=Vertical, PackageDescription="Assembly, Socket Strip .025[0.64] SQ Tail", PackageReference=SSQ-108-02-X-D, PackageVersion="BD, 6/1987", Pitch="2.54 mm", RoHS=True
SW: library part "Dip Switch Array SMD Half-Pitch", "Ultra-Miniature Surface Mount Half-Pitch DIP Switch, 25 mA, 24 V, -40 to 85 degC, 8-Pin SMD, RoHS, Tube", Case\Package=DIP, Contact Current Rating="100 mA", Max Contact Resistance="100 mohm", Max Current Rating="25 mA", Max Operating Temperature="85 degC", Max Voltage Rating (DC)="24 V", Min Operating Temperature="-40 degC", Package Quantity=70, ComponentLink1Description="Datasheet Link", ComponentLink1URL=https://www.ckswitches.com/media/1328/tda.pdf, ComponentLink2Description=Digi-Key_Purchase_URL, ComponentLink2URL=https://www.digikey.com/en/products/detail/c-k/TDA04H0SB1/1083755, Contact Finish=Gold, Contact Material=Copper, Contact Plating=Gold, Current Rating="100 mA", DatasheetVersion=02/2016, Digi-Key_Part_Number=CKN9065-ND, Height="2.3 mm", Lead Pitch="1.27 mm", Length="6.21 mm", Mount="Surface Mount", Mounting Technology="Surface Mount", PackageDescription="8-Pin Surface Mount Device, Body 6.21 x 6.2 mm, Pitch 1.27 mm", PackageReference=TDA04H0SB1R, Packaging=Rail/Tube, Pins=4, Radiation Hardening=No, REACH SVHC="No SVHC", RoHSCompliant=true, Throw Configuration=SPST, Voltage Rating (DC)="24 V"
U1 U2 U3: library part CMP-0387-00547-2, "6 A Wide-Input Voltage Adjustable Switching Regulator, -40 to 85 degC, 7-pin Module (EUK7), Pb-Free (RoHS)", Manufacturer="Texas Instruments", ComponentLink1Description="Manufacturer URL", ComponentLink1URL=http://www.ti.com/, ComponentLink2Description=Datasheet, ComponentLink2URL=http://www.ti.com/general/docs/lit/getliterature.tsp?genericPartNumber=PTN78020W&fileType=pdf, ComponentLink3Description="Package Specification", ComponentLink3URL=http://www.ti.com/litv/pdf/mpds185, ComponentLink4Description="URL Link1", ComponentLink4URL="Samples URL:http://www.ti.com/product/ptn78020w#samples", DatasheetVersion=SLTS228C, Eco-Plan="Pb-Free (RoHS)", Iout(Max)(A)=6, Mounting Technology="Through Hole", PackageDescription="7-Pin Plastic Special Shape, Body 22.1 x 37.97 mm", PackageReference=EUK0007A, PackageVersion=4204986-2/C, PartNumber=PTN78020WAH, Regulated Outputs(#)=1, SubFamily="Non-Isolated POL", Vin(Max)(V)=36, Vin(Min)(V)=7, VO Adjustable=TRUE, Vout(Max)(V)=12.6, Vout(Min)(V)=2.5
U4: library part "Power Converter", "Switching Regulator 7-36Vin 5Vo 1.5A Non-Isolated DC-DC Converter, 5V dc Output, 1.5A", Manufacturer_Name="Murata Electronics", Manufacturer_Part_Number=OKI-78SR-5/1.5-W36H-C, Mouser Part Number=580-OKI78SR51.5W36HC, Datasheet Link=https://componentsearchengine.com/Datasheets/1/OKI-78SR-5_1.5-W36H-C.pdf
U5 U6 U7 U8: library part CMP-0704-00057-2, "High-Side Measurement, Bi-Directional Current / Power Monitor with I2C Interface, 2.7 to 5.5 V, -40 to 125 degC, 10-pin SOP (DGS10), Green (RoHS & no Sb/Br)", Quiescent Current (+/-)(Typ)(mA)=0.33, Rating=Catalog, CMRR(Min)(dB)=126, Code_JEDEC=MO-153, Common Mode Range(Max)(V)=36, Common Mode Range(Min)(V)=0, ComponentLink1Description="Manufacturer URL", ComponentLink1URL=http://www.ti.com/, ComponentLink2Description=Datasheet, ComponentLink2URL=http://www.ti.com/general/docs/lit/getliterature.tsp?genericPartNumber=INA226&fileType=pdf, ComponentLink3Description="Package Specification", ComponentLink3URL=http://www.ti.com/lit/ml/mpds035b/mpds035b.pdf, DatasheetVersion=SBOS547, Eco-Plan="Green (RoHS & no Sb/Br)", Gain(V/V)=1, Input Offset (+/-)(Max)(uV)=10, Input Offset Drift (+/-)(Max)(uV/Degrees Celsius)=0.1, Mounting Technology="Surface Mount", PackageDescription="10-Pin Plastic Small Outline, Body 3 x 3 mm, Pitch 0.5 mm", PackageReference=DGS0010A, PackageVersion="4073272/C, 02/2004", PartNumber=INA226AIDGST, Small-Signal Bandwidth(Typ)(MHz)=0.007, SubFamily="Current Shunt Monitor", Vs(Max)(V)=5.5, Vs(Min)(V)=2.7
U9: library part "PSOC MC", "64 pin psoc", ComponentLink1Description=Datasheet, ComponentLink1URL=https://www.cypress.com/file/222206/download, Part_Number=CY8C4248AZI-L485
U10: library part "CAN Tranceiver", "Microchip MCP2562-E/SN, CAN Transceiver 1MBps 1-channel IEC 61000-4-2, 8-Pin SOIC", Package="SO-8 Microchip", Availability=Unavailable, ComponentLink1Description=Digi-Key_Purchase_URL, ComponentLink1URL=https://www.digikey.com/en/products/detail/microchip-technology/MCP2562T-E-SN/5011025, ComponentLink2Description=Datasheet_Link, ComponentLink2URL=http://www.microchip.com/mymicrochip/filehandler.aspx?ddocname=en561044, Digi-Key_Part_Number=MCP2562T-E/SNCT-ND, MF=Microchip, MP=MCP2562-E/SN, Price=None, SnapEDA_Link=https://www.snapeda.com/parts/MCP2562-E/SN/Microchip/view-part/?ref=snap
Y1: library part Oscilator, "Standard Clock Oscillators", Arrow Part Number="SG-636PCW 50.0000MC3: ROHS", Manufacturer_Name="Epson Timing", ComponentLink1Description=Digi-Key_Purchase_URL, ComponentLink1URL=https://www.digikey.com/en/products/detail/epson/SG-636PTF-40.0000MC3-ROHS/1532628, ComponentLink2Description=Datasheet_Link, ComponentLink2URL=https://support.epson.biz/td/api/doc_check.php?dl=brief_SG-636PTF&lang=en, Digi-Key_Part_Number=SER3624CT-ND, Manufacturer_Part_Number="SG-636PCW 50.0000MC3: ROHS"

## Via types
v1: diameter 240, hole 126, Top Layer to Bottom Layer, 12 vias

## Nets (pads, with @x,y where several pads share a name; then routed paths per layer and width w, separated by ;. In a path a pad name is that pad's centre, name@x,y a point inside that pad or via, vN(x,y) a via of type N, cw(c..) or ccw(c..) an arc to the next point about the centre after c; other vN are vias at no path point)
3V3_Alert: U5.3 U9.15
3V3_Converter_Enable: 3V3_Converter_Enable.1 R5.2 U9.43
3V3_Converter_Out: 3V3.1 C9.1 R7.1 R11.2 R30.1 U3.5 U3.6
3V3_Out: 3V3_1.2 3V3_2.2 "Standard Header1.2" "Standard Header2.2" "Standard Header3.2" "Standard Header.2" R7.2 R12.2
5V_Alert: U6.3 U9.16
5V_Converter_Enable: 5V_Converter_Enable.1 R3.2 U9.18
5V_Converter_Out: 5V.1 C6.1 R8.1 R13.2 R29.1 U2.5 U2.6
5V_Out: 5V_1.2 5V_2.2 5V_3.2 5V_4.2 "Standard Header1.1" "Standard Header2.1" "Standard Header3.1" "Standard Header.1" R8.2 R14.2
12V_Alert: U7.3 U9.19
12V_Converter_Enable: 12V_Converter_Enable.1 R1.2 U9.37
12V_Converter_Out: 12V.1 C3.1 R9.1 R15.2 R28.2 U1.5 U1.6
12V_Out: 12V_2.2 12V_3.2 12V_4.2 12V_5.2 12V_6.2 F13.1 R9.2 R16.2
24V_Alert: U8.3 U9.29
24V_Out: 24V.1 24V_1.2 24V_2.2 24V_3.2 24V_4.2 "Standard Header1.5" "Standard Header1.7" "Standard Header1.9" "Standard Header1.11" "Standard Header1.13" "Standard Header1.15" "Standard Header2.5" "Standard Header2.7" "Standard Header2.9" "Standard Header2.11" "Standard Header2.13" "Standard Header2.15" "Standard Header3.5" "Standard Header3.7" "Standard Header3.9" "Standard Header3.11" "Standard Header3.13" "Standard Header3.15" "Standard Header.5" "Standard Header.7" "Standard Header.9" "Standard Header.11" "Standard Header.13" "Standard Header.15" R10.2 R18.2
+5: 3V3_Current_Sense.1 5V_Board.1 5V_Current_Sense.1 12V_Current_Sense.1 24V_Current_Sense.1 "CAN PWR.1" "PRG Header.1" "UART Debug.3" Battery_Level_High.1 Battery_Level_Low.1 Battery_Level_Mid.1 C11.2 C16.2 C17.2 C18.2 C19.2 C20.1 C21.1 C22.1 C25.1 C26.2 C27.1 C28.1 C29.1 C30.1 C31.1 C32.1 C33.1 C34.1 C35.2 CAN1.2 CAN2.2 CAN3.2 R20.2 R21.1 R31.1 R32.2 R33.2 R34.2 R36.2 U4.3 U5.6 U6.2 U6.6 U7.6 U8.6 U9.11 U9.26 U9.50 U9.56 U10.3 U10.5 Y1.1 Y1.4
Battery_LEDs: R35.1 U9.30
CANH: "Standard Header1.3" "Standard Header2.3" "Standard Header3.3" "Standard Header.3" CAN1.3 CAN2.3 CAN3.3 CANH.1 R38.2 U10.7
CANL: "CAN TRMTN.2" "Standard Header1.4" "Standard Header2.4" "Standard Header3.4" "Standard Header.4" CAN1.4 CAN2.4 CAN3.4 CANL.1 U10.6
CANRX: U9.39 U10.4
CANTX: U9.40 U10.1
Current_Sensor_SCL: R21.2 U5.5 U6.5 U7.5 U8.2 U8.5 U9.2
Current_Sensor_SDA: R20.1 U5.4 U6.4 U7.2 U7.4 U8.4 U9.3
Dip1: R22.2 U9.61
Dip2: R23.2 U9.62
Dip3: R24.2 U9.63
Dip4: R25.2 U9.64
GND: 3V3_1.1 3V3_2.1 3V3_Current_Sense.3 5V_1.1 5V_2.1 5V_3.1 5V_4.1 5V_Current_Sense.3 12V_1_Protected.1 12V_2.1 12V_3.1 12V_4.1 12V_5.1 12V_6.1 12V_Current_Sense.3 24V_1.1 24V_2.1 24V_3.1 24V_4.1 24V_Current_Sense.3 "3.3V O.1" "5V O.1" "5V PWR.1" "12V O.1" "24V O.1" "PRG Header.3" "PRG Header.5" "PRG Header.9" "PWR In.1" "Standard Header1.6" "Standard Header1.8" "Standard Header1.10" "Standard Header1.12" "Standard Header1.14" "Standard Header1.16" "Standard Header2.6" "Standard Header2.8" "Standard Header2.10" "Standard Header2.12" "Standard Header2.14" "Standard Header2.16" "Standard Header3.6" "Standard Header3.8" "Standard Header3.10" "Standard Header3.12" "Standard Header3.14" "Standard Header3.16" "Standard Header.6" "Standard Header.8" "Standard Header.10" "Standard Header.12" "Standard Header.14" "Standard Header.16" "UART Debug.5" Battery_Level_High.3 Battery_Level_Low.3 Battery_Level_Mid.3 BatteryIn1.1 BatteryIn2.1 C1.2 C2.1 C3.2 C4.2 C5.1 C6.2 C7.2 C8.1 C9.2 C10.1 C11.1 C16.1 C17.1 C18.1 C19.1 C20.2 C21.2 C22.2 C23.1 C24.2 C25.2 C26.1 C27.2 C28.2 C29.2 C30.2 C31.2 C32.2 C33.2 C34.2 C35.1 CAN1.1 CAN2.1 CAN3.1 D1.2 GND.1 R1.1 R2.2 R3.1 R4.2 R5.1 R6.2 R37.1 Reset.1a Reset.1b SW.1 SW.2 SW.3 SW.4 U1.1 U1.7 U2.1 U2.7 U3.1 U3.7 U4.2 U5.1 U5.2 U5.7 U6.1 U6.7 U7.1 U7.7 U8.1 U8.7 U9.10 U9.17 U9.49 U9.57 U10.2 U10.8 Y1.2
"LED CAN": CAN.1 U9.14
"LED Debug": Debug.1 U9.13
"LED Fault": Fault.1 U9.12
"Net3.3V O_2": "3.3V O.2" R30.2
Net3V3_Converter_Enable_2: 3V3_Converter_Enable.2 U3.3
Net3V3_Current_Sense_4: 3V3_Current_Sense.4 5V_Current_Sense.2
"Net5V O_2": "5V O.2" R29.2
"Net5V PWR_2": "5V PWR.2" R31.2
Net5V_Converter_Enable_2: 5V_Converter_Enable.2 U2.3
Net5V_Current_Sense_4: 5V_Current_Sense.4 12V_Current_Sense.2
"Net12V O_2": "12V O.2" R28.1
Net12V_1_Protected_2: 12V_1_Protected.2 D1.1 F13.2
Net12V_Converter_Enable_2: 12V_Converter_Enable.2 U1.3
Net12V_Current_Sense_4: 12V_Current_Sense.4 24V_Current_Sense.2
"Net24V O_2": "24V O.2" R27.2
Net24V_Current_Sense_4: 24V_Current_Sense.4 Battery_Level_Low.2
NetBattery_Level_High_2: Battery_Level_High.2 Battery_Level_Mid.4
NetBattery_Level_High_4: Battery_Level_High.4 R35.2
NetBattery_Level_Low_4: Battery_Level_Low.4 Battery_Level_Mid.2
NetC12_1: C12.1 R11.1 U5.10
NetC12_2: C12.2 R12.1 U5.8 U5.9
NetC13_1: C13.1 R13.1 U6.10
NetC13_2: C13.2 R14.1 U6.8 U6.9
NetC14_1: C14.1 R15.1 U7.10
NetC14_2: C14.2 R16.1 U7.8 U7.9
NetC15_1: C15.1 R17.1 U8.10
NetC15_2: C15.2 R18.1 U8.8 U8.9
NetC24_1: C24.1 U9.48
"NetCAN TRMTN_1": "CAN TRMTN.1" R38.1
NetCAN_2: CAN.2 R32.1
NetDebug_2: Debug.2 R33.1
NetFault_2: Fault.2 R34.1
"NetPWR In_2": "PWR In.2" R26.1
NetR2_1: R2.1 U1.4
NetR4_1: R4.1 U2.4
NetR6_1: R6.1 U3.4
NetR19_2: R19.2 U9.47
NetR22_1: R22.1 SW.8
NetR23_1: R23.1 SW.7
NetR24_1: R24.1 SW.6
NetR25_1: R25.1 SW.5
Oscillator: U9.45 Y1.3
Power_In: BatteryIn1.2 BatteryIn2.2 C1.1 C2.2 C4.1 C5.2 C7.1 C8.2 C10.2 Power_In.1 R10.1 R17.2 R26.2 R27.1 U1.2 U2.2 U3.2 U4.1
PRG_Clock: "PRG Header.4" PNG_Clock.1 R37.2 U9.21
PRG_Data: "PRG Header.2" PRG_Data.1 R36.1 U9.20
Reset: "PRG Header.10" C23.2 R19.1 Reset.1 Reset.2a Reset.2b
UARTRX: "UART Debug.1" U9.58
UARTTX: "UART Debug.2" U9.59
pads on no net: 3V3_1.9 3V3_2.9 3V3_Converter_Enable.3 3V3_Current_Sense.2 5V_1.9 5V_2.9 5V_3.9 5V_4.9 5V_Converter_Enable.3 12V_1_Protected.9 12V_2.9 12V_3.9 12V_4.9 12V_5.9 12V_6.9 12V_Converter_Enable.3 24V_1.9 24V_2.9 24V_3.9 24V_4.9 "CAN TRMTN.3" "PRG Header.6" "PRG Header.7" "PRG Header.8" "UART Debug.4" BatteryIn1. BatteryIn2. CAN1. CAN1.7 CAN2. CAN2.7 CAN3. CAN3.7 U9.1 U9.4 U9.5 U9.6 U9.7 U9.8 U9.9 U9.22 U9.23 U9.24 U9.25 U9.27 U9.28 U9.31 U9.32 U9.33 U9.34 U9.35 U9.36 U9.38 U9.41 U9.42 U9.44 U9.46 U9.51 U9.52 U9.53 U9.54 U9.55 U9.60
copper on no net:
  other v1: 150,150 4850,150 250,450 4750,450 250,2150 4750,2150 255,2600 4750,2600 255,4300 4750,4300 150,4600 4850,4600

## Silkscreen, mask and mechanical layers (free items; w line width, h text height)
Top Overlay:
  lines w10: 3905,940 4020,940 ; 3970,350 4350,350 ; 3970,615 4350,615 ; 4095,900 4095,940 ; 4210,900 4210,940 ; 3970,80 4350,80 4350,900 3970,900 3970,80

## Text inside footprints (layer, text, board x,y; h text height)
C1: Top Overlay "+" at 1900.99,1448.27 h59.06 r270
C4: Top Overlay "+" at 3089.02,1219.29 h59.06 r90
C7: Top Overlay "+" at 770.97,1448.26 h59.06 r270
U9: Top Overlay "64" at 2580,1152 h19.68; Top Overlay "49" at 2881,1152 h19.68; Top Overlay "48" at 3018,1018 h19.68; Top Overlay "33" at 3019,720 h19.68; Top Overlay "32" at 2883,588 h19.68; Top Overlay "17" at 2576,586 h19.68; Top Overlay "16" at 2447.35,721.13 h19.68